# EAGLE board simple_h (EAGLE 5.06)
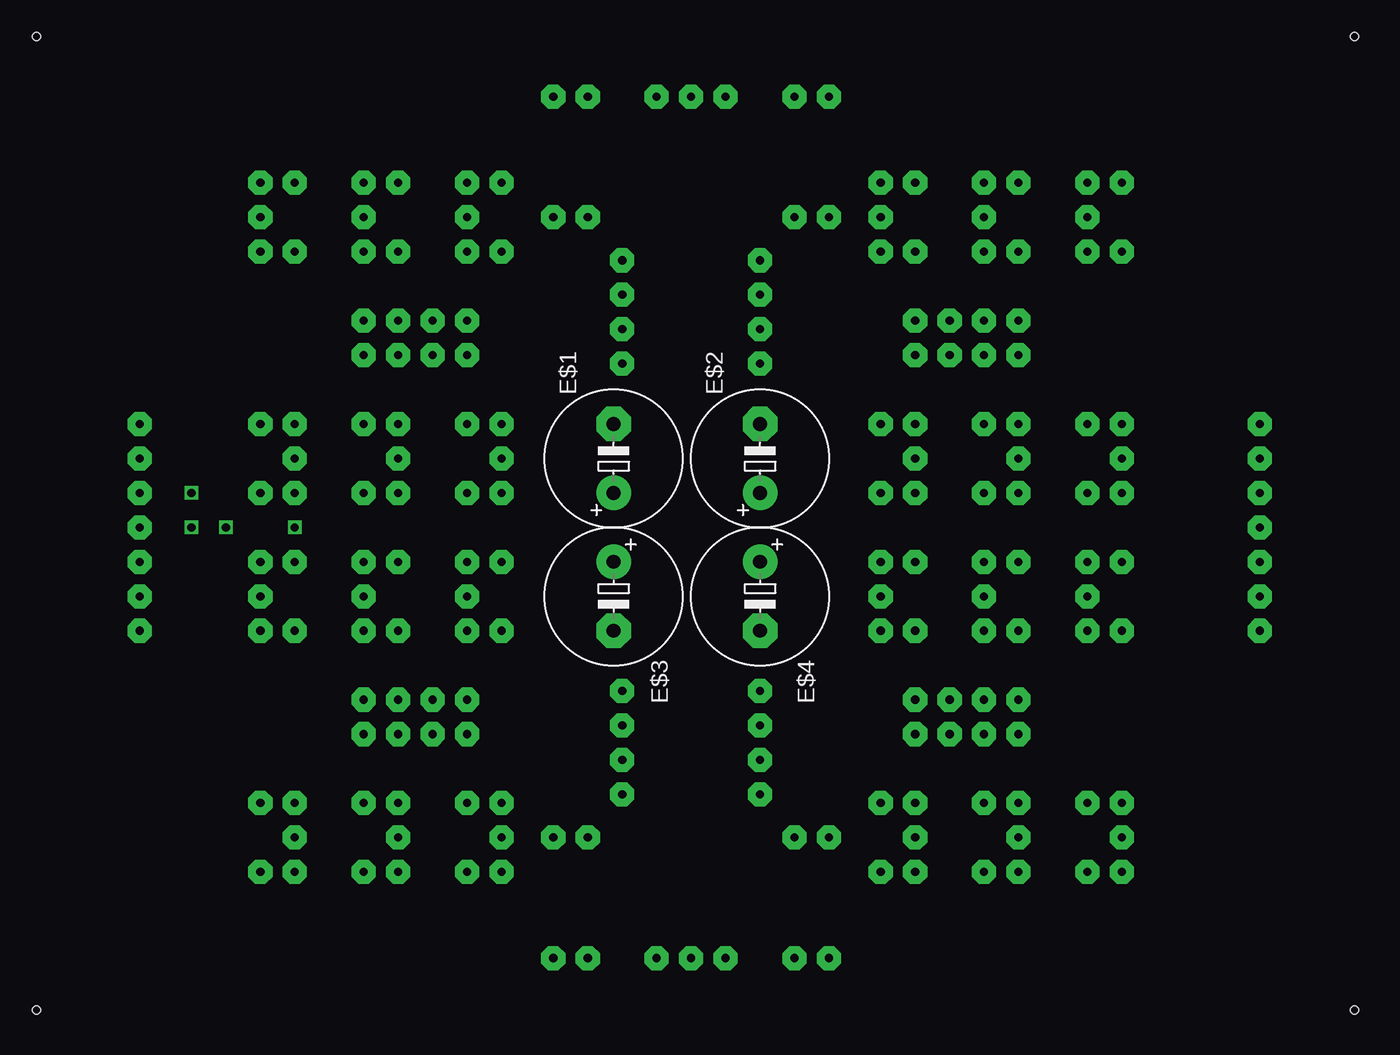
[diagram p0: board, top side]
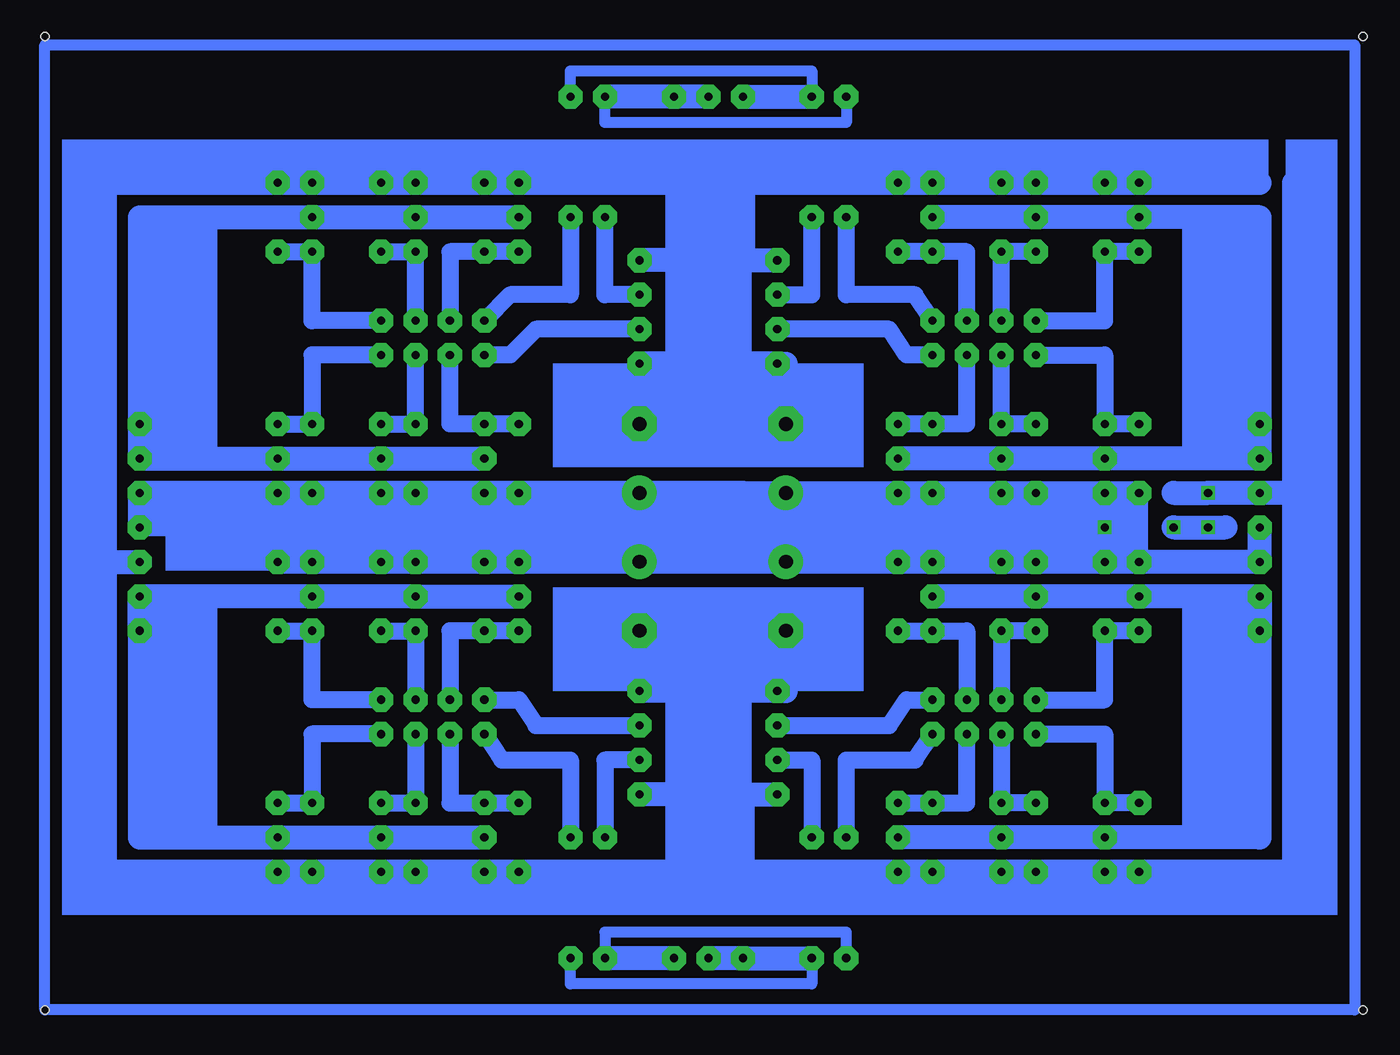
[diagram p1: board, bottom side, seen from below]

No outline drawn. Coordinates in mm, seen from the top.
Copper layers (1*16): Top 0.035mm / dielectric 1.5mm / Bottom 0.035mm
Design rules "default": minimum track width 10mil, minimum drill 24mil, track to track 8mil, track to pad 8mil, pad to pad 8mil, via to via 8mil, smd to smd 8mil, copper to edge 40mil, drill to drill 8mil, minimum pad ring 10mil, minimum via ring 8mil, stop-mask expansion 4mil, vias tented up to drill 0mil, thermal gap 10mil
Holes 0.6 mm at 0,0 0,71.75 97.16,71.75 97.16,0

## Footprints (pad centres in the part's own frame; a part is rotated, then mirrored left to right if it is on the bottom)
E5-10,5 = drill 1.016 pad 2.54 round: + -2.54,0 | drill 1.016 pad 2.54 octagon: - 2.54,0

## Placement (x,y rotation side)
E$1  [E5-10,5]  42.55,40.64 90 top
E$2  [E5-10,5]  53.34,40.64 90 top
E$3  [E5-10,5]  42.55,30.48 270 top
E$4  [E5-10,5]  53.34,30.48 270 top

## Library data of the parts
E$1-E$4 = rcl

## Nets
S$31: E$3.-
S$41: E$1.- E$2.-

## Tracks (layer width: path | path; a pad name or v marks a point on that pad's centre or on a via)
S$1  (via drill 0.6 pad 1.78)
  Bottom 1.778: v34.29,12.7 v26.67,12.7 v19.05,12.7 7.62,12.7 v7.62,30.48 | v7.62,30.48 v16.51,30.48 v24.13,30.48 v31.75,30.48 | v7.62,30.48 v7.62,27.94
S$2  (via drill 0.6 pad 1.78)
  Bottom 1.27: v43.18,18.41 40.64,18.41 v40.64,12.7
S$3  (via drill 0.6 pad 1.78)
  Bottom 1.27: v53.34,18.41 55.88,18.41 v55.88,12.7
S$4
  Bottom 0.813: 97.16,71.12 0.64,71.12 0.64,0 97.16,0 97.16,71.12
S$6  (via drill 0.6 pad 1.78)
  other vias: 26.67,38.1
S$8  (via drill 0.6 pad 1.78)
  Bottom 0.813: v38.1,3.81 38.1,5.71 55.88,5.71 v55.88,3.81
  Bottom 1.778: v50.8,3.81 v55.88,3.81
S$10  (via drill 0.6 pad 1.78)
  Bottom 0.406: v62.23,10.16 45.72,10.16 v34.29,10.16
  Bottom 1.778: 45.72,15.88 v53.34,15.88 | 45.72,15.88 v43.18,15.88 | 45.72,10.16 45.72,15.88
S$11  (via drill 0.6 pad 1.78)
  other vias: 69.85,33.02
S$12  (via drill 0.6)
  other vias: 11.43,35.56
S$13  (via drill 0.6 pad 1.78)
  Bottom 1.778: v34.29,40.64 v26.67,40.64 v19.05,40.64 7.62,40.64 | v31.75,58.42 v24.13,58.42 v16.51,58.42 7.62,58.42 7.62,40.64 | 7.62,40.64 v7.62,43.18
S$14  (via drill 0.6 pad 1.78)
  other vias: 69.85,10.16
S$15  (via drill 0.6 pad 1.78)
  other vias: 26.67,10.16
S$16  (via drill 0.6 pad 1.78)
  Bottom 1.27: v24.13,48.26 19.05,48.26 v19.05,43.18 v16.51,43.18
S$17  (via drill 0.6 pad 1.78)
  other vias: 26.67,33.02
S$18  (via drill 0.6 pad 1.78)
  Bottom 1.27: v67.31,20.32 67.31,15.24 v64.77,15.24 v62.23,15.24
S$19  (via drill 0.6 pad 1.78)
  Bottom 1.27: v64.77,20.32 63.5,18.41 58.42,18.41 v58.42,12.7
S$20  (via drill 0.6 pad 1.78)
  Bottom 1.27: v67.31,50.8 67.31,55.88 v64.77,55.88 v62.23,55.88
S$21  (via drill 0.6 pad 1.78)
  Bottom 1.27: v26.67,48.26 v26.67,43.18 v24.13,43.18
S$22  (via drill 0.6 pad 1.78)
  other vias: 26.67,60.96
S$23  (via drill 0.6 pad 1.78)
  Bottom 1.27: v64.77,22.86 62.23,22.86 60.96,20.95 v53.34,20.95
S$24  (via drill 0.6 pad 1.78)
  other vias: 69.85,60.96
S$25  (via drill 0.6 pad 1.78)
  Bottom 1.27: v58.42,58.42 58.42,52.7 62.87,52.7 v64.77,50.8
S$26  (via drill 0.6 pad 1.78)
  Bottom 1.27: v62.23,27.94 v64.77,27.94 67.31,27.94 v67.31,22.86
S$27  (via drill 0.6 pad 1.78)
  Bottom 1.27: v26.67,50.8 v26.67,55.88 v24.13,55.88
S$28  (via drill 0.6 pad 1.78)
  Bottom 1.27: v29.21,22.86 29.21,27.94 v31.75,27.94 v34.29,27.94
S$29  (via drill 0.6 pad 1.78)
  Bottom 1.27: v43.18,20.95 34.92,20.95 33.66,22.86 v31.75,22.86
S$30  (via drill 0.6 pad 1.78)
  Bottom 1.27: v29.21,20.32 29.21,15.24 v31.75,15.24 v34.29,15.24
S$31  (via drill 0.6 pad 1.78)
  Bottom 1.778: v43.18,23.5 v53.34,23.5 | 53.98,27.94 53.34,27.94 | v53.34,23.5 53.34,27.94 | 53.34,27.94 E$3.- 42.55,23.5 v53.34,23.5
S$32  (via drill 0.6 pad 1.78)
  Bottom 1.27: v38.1,12.7 38.1,18.41 33.02,18.41 v31.75,20.32
S$33  (via drill 0.6 pad 1.78)
  Bottom 1.27: v69.85,20.32 v69.85,15.24 v72.39,15.24
S$34  (via drill 0.6 pad 1.78)
  Bottom 1.27: v67.31,48.26 67.31,43.18 v64.77,43.18 v62.23,43.18
S$35  (via drill 0.6 pad 1.78)
  Bottom 0.406: v34.29,60.96 45.72,60.96 v62.23,60.96
  Bottom 1.778: 45.72,55.24 v43.18,55.24 | 45.72,55.24 v53.34,55.24 | 45.72,60.96 45.72,55.24
S$36  (via drill 0.6 pad 1.78)
  Bottom 1.27: v69.85,50.8 v69.85,55.88 v72.39,55.88
S$37  (via drill 0.6 pad 1.78)
  Bottom 1.27: v72.39,50.8 77.47,50.8 v77.47,55.88 v80.01,55.88
S$38  (via drill 0.6 pad 1.78)
  Bottom 1.27: v53.34,52.7 55.88,52.7 v55.88,58.42
S$39  (via drill 0.6 pad 1.78)
  Bottom 1.27: v31.75,48.26 33.66,48.26 34.92,50.16 v43.18,50.16
S$40  (via drill 0.6 pad 1.78)
  Bottom 1.27: v43.18,52.7 40.64,52.7 v40.64,58.42
S$41  (via drill 0.6 pad 1.78)
  Bottom 0.813: v53.34,47.62 v43.18,47.62
  Bottom 1.778: v43.18,47.62 v53.34,47.62 | v53.34,47.62 E$2.- E$1.- 42.55,47.62 v53.34,47.62
S$44  (via drill 0.6 pad 1.78)
  Bottom 0.813: v58.42,67.31 58.42,69.22 40.64,69.22 v40.64,67.31
  Bottom 1.778: v45.72,67.31 v40.64,67.31
S$45  (via drill 0.6 pad 1.78)
  Bottom 1.27: v26.67,20.32 v26.67,15.24 v24.13,15.24
S$46  (via drill 0.6 pad 1.78)
  Bottom 1.27: v24.13,20.32 19.05,20.32 v19.05,15.24 v16.51,15.24
S$47  (via drill 0.6 pad 1.78)
  Bottom 1.27: v26.67,22.86 v26.67,27.94 v24.13,27.94
S$48  (via drill 0.6 pad 1.78)
  Bottom 1.27: v24.13,22.86 19.05,22.86 v19.05,27.94 v16.51,27.94
S$49  (via drill 0.6)
  other vias: 19.05,35.56
S$50  (via drill 0.6 pad 1.78)
  Bottom 1.27: v29.21,50.8 29.21,55.88 v31.75,55.88 v34.29,55.88
S$51  (via drill 0.6 pad 1.78)
  Bottom 1.27: v72.39,20.32 77.47,20.32 v77.47,15.24 v80.01,15.24
S$52  (via drill 0.6 pad 1.78)
  Bottom 1.27: v72.39,22.86 77.47,22.86 v77.47,27.94 v80.01,27.94
S$53  (via drill 0.6 pad 1.78)
  Bottom 1.27: v69.85,22.86 v69.85,27.94 v72.39,27.94
S$54  (via drill 0.6)
  Bottom 1.778: v13.97,35.56 10.16,35.56
S$55  (via drill 0.6 pad 1.78)
  other vias: 7.62,33.02
S$57  (via drill 0.6 pad 1.78)
  other vias: 69.85,38.1
S$58  (via drill 0.6 pad 1.78)
  Bottom 1.27: v31.75,50.8 33.02,52.7 38.1,52.7 v38.1,58.42
S$60  (via drill 0.6 pad 1.78)
  Bottom 1.27: v34.29,43.18 v31.75,43.18 29.21,43.18 v29.21,48.26
S$61  (via drill 0.6 pad 1.78)
  Bottom 1.27: v69.85,48.26 v69.85,43.18 v72.39,43.18
S$62  (via drill 0.6 pad 1.78)
  Bottom 1.27: v72.39,48.26 77.47,48.26 v77.47,43.18 v80.01,43.18
S$64  (via drill 0.6 pad 1.78)
  Bottom 0.406: v19.05,38.1 v24.13,38.1 v31.75,38.1 v34.29,38.1 45.72,38.1 v62.23,38.1 | v77.47,33.02 v72.39,33.02 v64.77,33.02 v62.23,33.02 45.72,33.02 v34.29,33.02
  Bottom 1.778: v90.17,35.56 v90.17,38.1 v80.01,38.1 v77.47,38.1 v72.39,38.1 v64.77,38.1 45.72,38.1 | v16.51,38.1 v19.05,38.1 v24.13,38.1 v31.75,38.1 45.72,38.1 | v80.01,33.02 v77.47,33.02 v72.39,33.02 v64.77,33.02 45.72,33.02 | 45.72,33.02 45.72,38.1 | 45.72,33.02 v31.75,33.02 v24.13,33.02 v19.05,33.02 v16.51,33.02 7.62,33.02 v7.62,35.56
S$65  (via drill 0.6 pad 1.78)
  Bottom 1.27: v53.34,50.16 60.96,50.16 62.87,48.26 v64.77,48.26
S$67  (via drill 0.6 pad 1.78)
  Bottom 1.27: v24.13,50.8 19.05,50.8 v19.05,55.88 v16.51,55.88
S$70  (via drill 0.6 pad 1.78)
  Bottom 1.778: v90.17,27.94 v90.17,30.48 | v62.23,30.48 v69.85,30.48 v77.47,30.48 v90.17,30.48 | v64.77,12.7 v72.39,12.7 v80.01,12.7 90.17,12.7 v90.17,30.48
S$72  (via drill 0.6 pad 1.78)
  Bottom 1.778: v90.17,43.18 v90.17,40.64 | v62.23,58.42 v69.85,58.42 v77.47,58.42 90.17,58.42 v90.17,40.64 | v90.17,40.64 v80.01,40.64 v72.39,40.64 v64.77,40.64
S$73  (via drill 0.6 pad 1.78)
  Bottom 0.813: v40.64,3.81 40.64,1.91 58.42,1.91 v58.42,3.81
  Bottom 1.778: v48.26,3.81 v45.72,3.81 v40.64,3.81
S$74  (via drill 0.6 pad 1.78)
  Bottom 0.813: v38.1,67.31 38.1,65.41 55.88,65.41 v55.88,67.31
  Bottom 1.778: v48.26,67.31 v50.8,67.31 v55.88,67.31
S$75  (via drill 0.6 pad 1.78)
  other vias: 7.62,40.64
S$79  (via drill 0.6, 0.6 pad 1.78)
  Bottom 1.778: 92.71,33.02 v90.17,33.02 | 92.71,33.02 92.71,60.96 v80.01,60.96 v77.47,60.96 v72.39,60.96 v64.77,60.96 v31.75,60.96 v24.13,60.96 v19.05,60.96 v16.51,60.96 7.62,60.96 | 92.71,33.02 92.71,10.16 v80.01,10.16 v77.47,10.16 v72.39,10.16 v64.77,10.16 v31.75,10.16 v24.13,10.16 v19.05,10.16 v16.51,10.16 5.08,10.16 5.08,38.1 | 5.08,38.1 5.08,60.96 | 5.08,38.1 v7.62,38.1 v11.43,38.1 13.97,38.1
(copper drawn outside any net)
  shapes: Bottom area x29